# EAGLE board SIHMTEST (EAGLE 8.0.0)
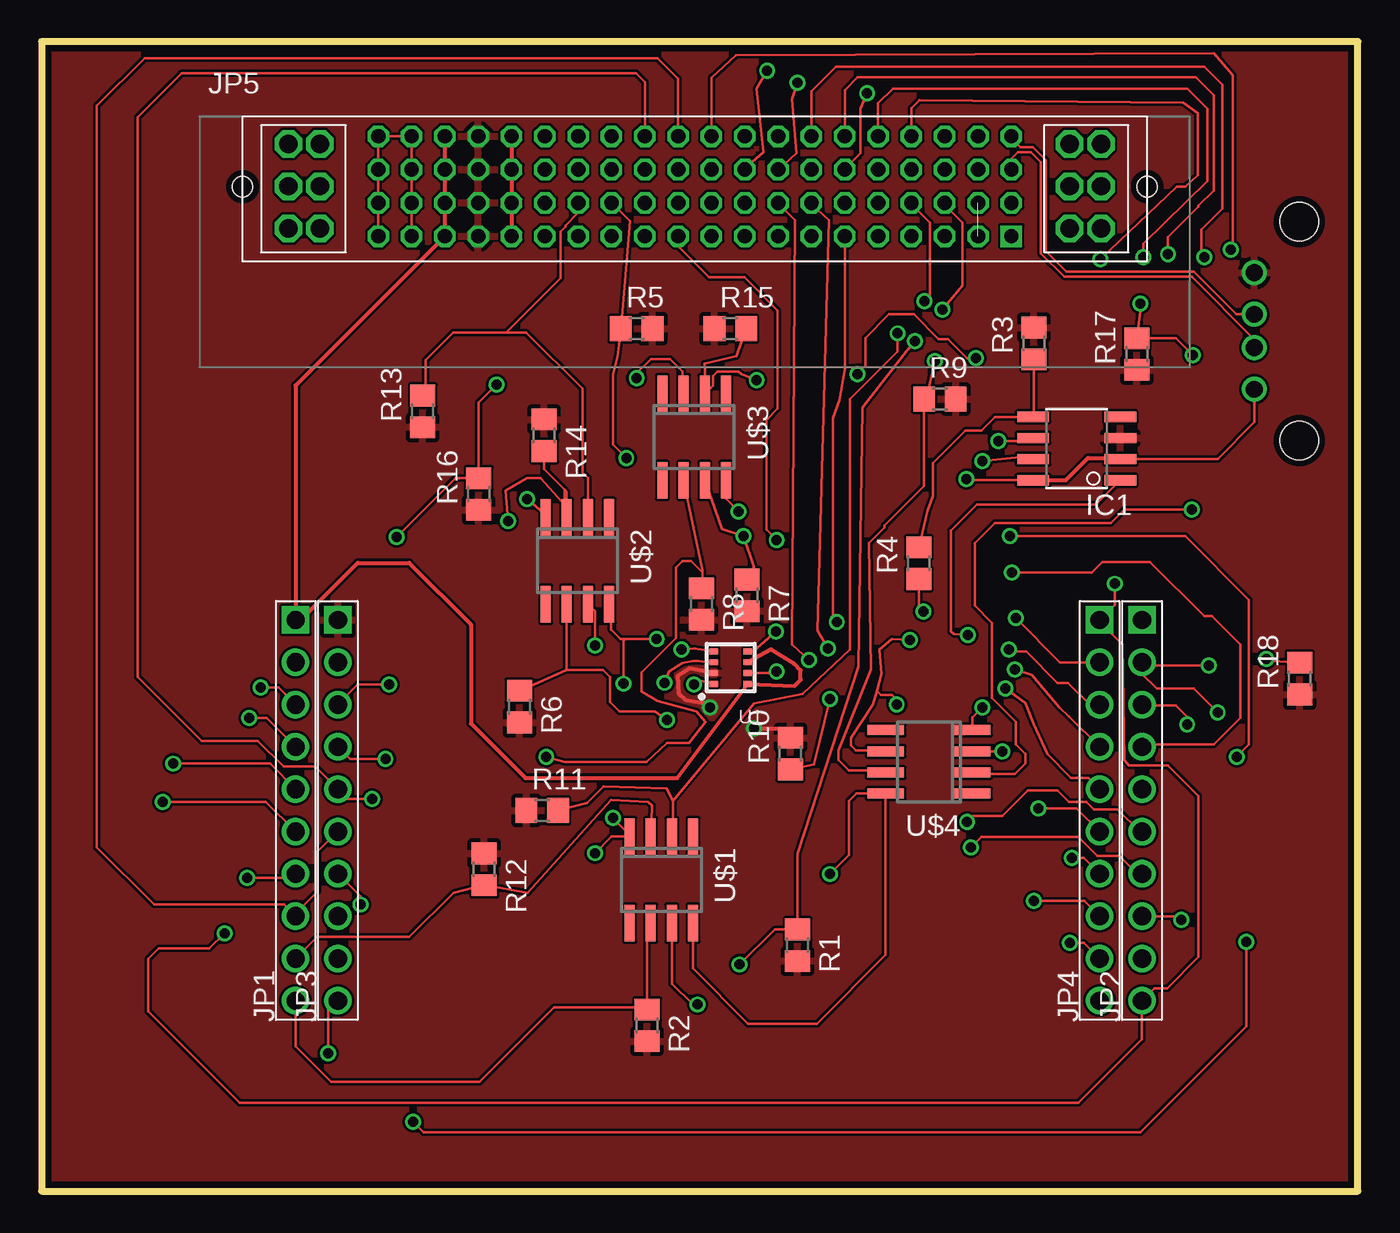
[diagram p0: board, top side]
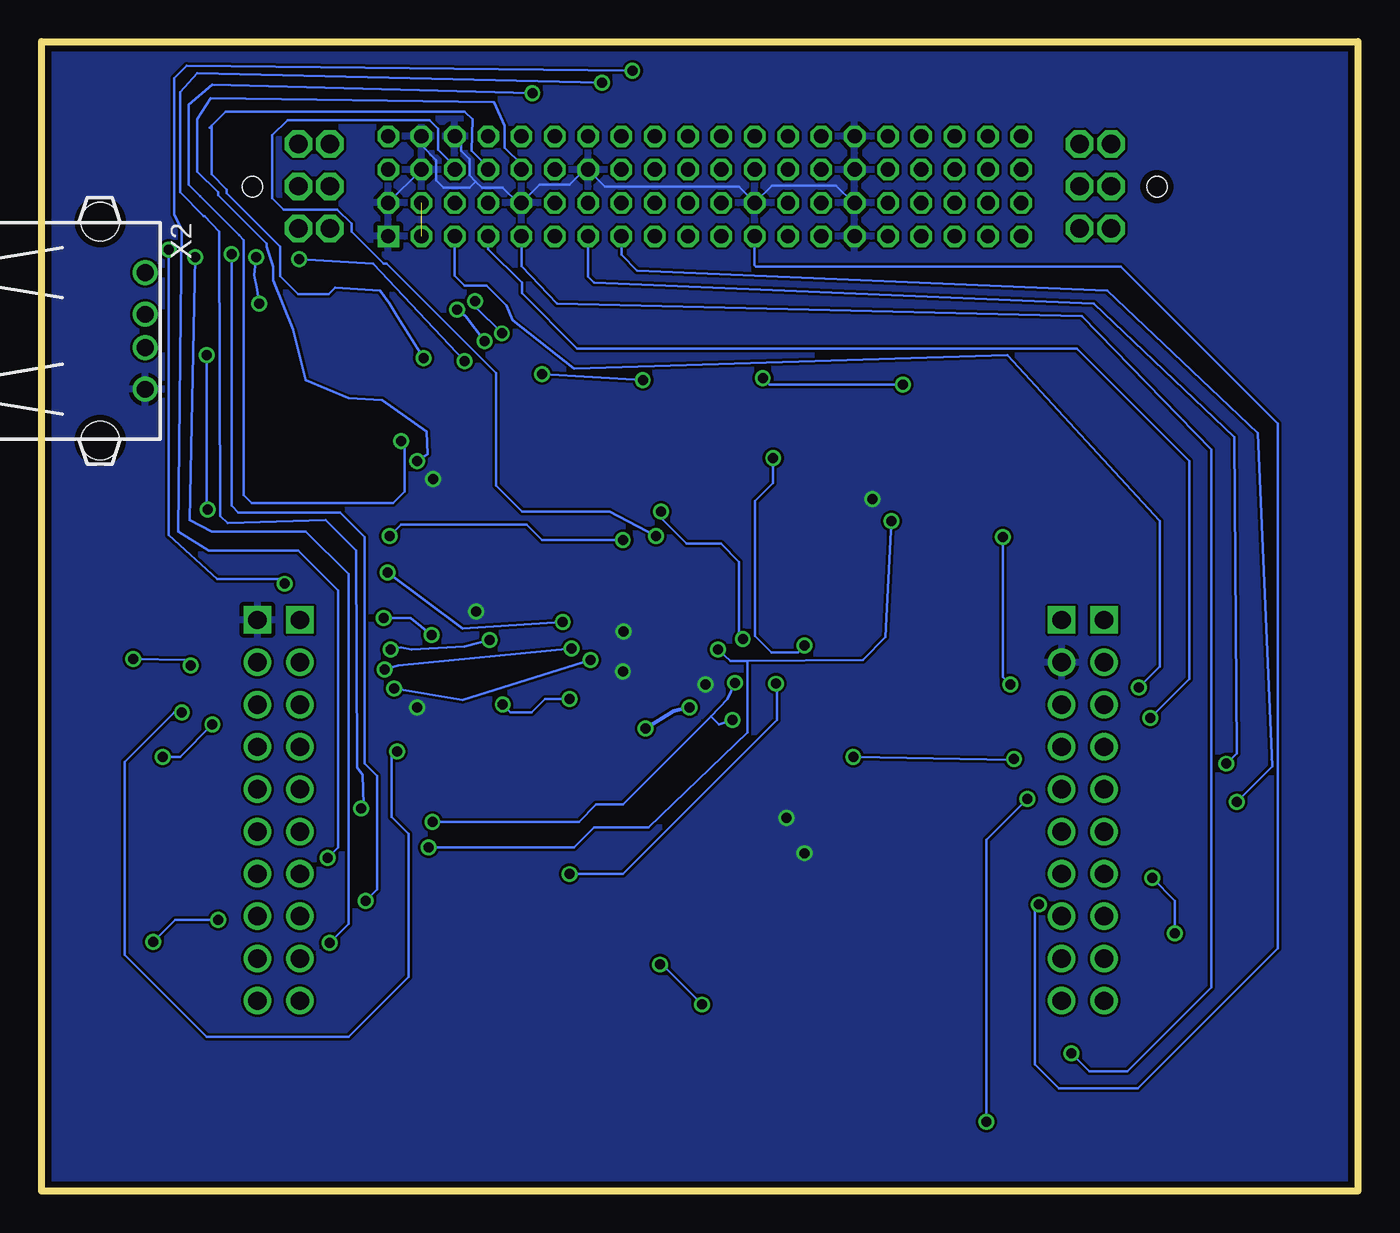
[diagram p1: board, bottom side, seen from below]

Size 79 x 69 mm. Coordinates in mm from the lower left corner, seen from the top.
Outline: 0,0 79,0 79,69 0,69 0,0
Copper layers (1*16): Top 0.0356mm / dielectric 1.5011mm / Bottom 0.0356mm
Design rules "OshPark": minimum track width 6mil, minimum drill 13mil, track to track 6mil, track to pad 6mil, pad to pad 6mil, via to via 6mil, smd to smd 6mil, copper to edge 15mil, drill to drill 6mil, minimum pad ring 7mil, minimum via ring 7mil, stop-mask expansion 3mil, vias tented up to drill 0mil, thermal gap 10mil
Net classes: 1 usb: clearance 0.152 mm

## Footprints (pad centres in the part's own frame; a part is rotated, then mirrored left to right if it is on the bottom)
SO08 = smd 0.61 x 1.905: 1 -1.905,-2.616; 2 -0.635,-2.616; 3 0.635,-2.616; 4 1.905,-2.616; 5 1.905,2.616; 6 0.635,2.616; 7 -0.635,2.616; 8 -1.905,2.616
KK254_10-PIN = drill 1.1 square: P$1 11.43,0 | drill 1.1: P$2 8.89,0; P$3 6.35,0; P$4 3.81,0; P$5 1.27,0; P$6 -1.27,0; P$7 -3.81,0; P$8 -6.35,0; P$9 -8.89,0; P$10 -11.43,0
MPSC-01-80 = drill 0.86 square: 1 19,0.33 | drill 0.86 octagon: 2 17,0.33; 3 15,0.33; 4 13,0.33; 5 11,0.33; 6 9,0.33; 7 7,0.33; 8 5,0.33; 9 3,0.33; 10 1,0.33; 11 -1,0.33; 12 -3,0.33; 13 -5,0.33; 14 -7,0.33; 15 -9,0.33; 16 -11,0.33; 17 -13,0.33; 18 -15,0.33; 19 -17,0.33; 20 -19,0.33; 21 19,2.33; 22 17,2.33; 23 15,2.33; 24 13,2.33; 25 11,2.33; 26 9,2.33; 27 7,2.33; 28 5,2.33; 29 3,2.33; 30 1,2.33; 31 -1,2.33; 32 -3,2.33; 33 -5,2.33; 34 -7,2.33; 35 -9,2.33; 36 -11,2.33; 37 -13,2.33; 38 -15,2.33; 39 -17,2.33; 40 -19,2.33; 41 19,4.33; 42 17,4.33; 43 15,4.33; 44 13,4.33; 45 11,4.33; 46 9,4.33; 47 7,4.33; 48 5,4.33; 49 3,4.33; 50 1,4.33; 51 -1,4.33; 52 -3,4.33; 53 -5,4.33; 54 -7,4.33; 55 -9,4.33; 56 -11,4.33; 57 -13,4.33; 58 -15,4.33; 59 -17,4.33; 60 -19,4.33; 61 19,6.33; 62 17,6.33; 63 15,6.33; 64 13,6.33; 65 11,6.33; 66 9,6.33; 67 7,6.33; 68 5,6.33; 69 3,6.33; 70 1,6.33; 71 -1,6.33; 72 -3,6.33; 73 -5,6.33; 74 -7,6.33; 75 -9,6.33; 76 -11,6.33; 77 -13,6.33; 78 -15,6.33; 79 -17,6.33; 80 -19,6.33 | drill 1.1 octagon: P1,1 -24.385,0.79; P1,2 -22.505,0.79; P1,3 -24.385,3.33; P1,4 -22.505,3.33; P1,5 -24.385,5.87; P1,6 -22.505,5.87; P2,1 24.385,0.789; P2,2 22.505,0.789; P2,3 24.385,3.329; P2,4 22.505,3.329; P2,5 24.385,5.869; P2,6 22.505,5.869 | hole 1.2: -27.145,3.3; 27.145,3.3
R0805 = smd 1.3 x 1.5: 1 -0.95,0; 2 0.95,0
BME280_LGA = smd 0.5 x 0.35: P$1 1.025,0.975; P$2 1.025,0.325; P$3 1.025,-0.325; P$4 1.025,-0.975; P$5 -1.025,-0.975; P$6 -1.025,-0.325; P$7 -1.025,0.325; P$8 -1.025,0.975
SO8 = smd 0.6 x 2.2: 1 -1.905,-2.6; 2 -0.635,-2.6; 3 0.635,-2.6; 4 1.905,-2.6; 5 1.905,2.6; 6 0.635,2.6; 7 -0.635,2.6; 8 -1.905,2.6
USB = drill 1: 1 -3.5,12.99; 2 -1,12.99; 3 1,12.99; 4 3.5,12.99 | hole 2.3: -6.57,10.28; 6.57,10.28

## Placement (x,y rotation side)
IC1  MCP2551/SN  [SO08]  62.12,44.58 90 top
JP1  KK254_10-PIN  [KK254_10-PIN]  15.24,22.86 90 top
JP2  KK254_10-PIN  [KK254_10-PIN]  66.04,22.86 90 top
JP3  KK254_10-PIN  [KK254_10-PIN]  17.78,22.86 90 top
JP4  KK254_10-PIN  [KK254_10-PIN]  63.5,22.86 90 top
JP5  [MPSC-01-80]  39.2,56.99 0 top
R1  5k  [R0805]  45.37,14.76 270 top
R2  5k  [R0805]  36.34,9.96 270 top
R3  10k  [R0805]  59.56,50.89 90 top
R4  10k  [R0805]  52.64,37.69 90 top
R5  5k  [R0805]  35.71,51.77 0 top
R6  5k  [R0805]  28.68,29.09 270 top
R7  5k  [R0805]  42.34,35.77 270 top
R8  5k  [R0805]  39.6,35.25 270 top
R9  5k  [R0805]  53.91,47.55 0 top
R10  5k  [R0805]  44.93,26.27 90 top
R11  5k  [R0805]  30.05,22.85 0 top
R12  5k  [R0805]  26.56,19.32 270 top
R13  5k  [R0805]  22.87,46.81 90 top
R14  5k  [R0805]  30.16,45.37 270 top
R15  5k  [R0805]  41.33,51.77 0 top
R16  5k  [R0805]  26.24,41.84 90 top
R17  5k  [R0805]  65.73,50.25 90 top
R18  5k  [R0805]  75.5,30.77 90 top
U1  BME280  [BME280_LGA]  41.36,31.43 180 top
U$1  P82B715  [SO8]  37.19,18.69 180 top
U$2  P82B715  [SO8]  32.15,37.83 180 top
U$3  P82B715  [SO8]  39.17,45.26 180 top
U$4  P82B715  [SO8]  53.26,25.77 90 top
X2  [USB]  85.78,51.63 270 bottom

## Library data of the parts
IC1 = microchip-dspic
JP1-JP4 = molex
JP5 = samtec
R1-R18 = resistor
U1 = BME280ComponentLibrary; PROD_ID: IC-13090
U$1-U$4 = NXP
X2 = con-amp

## Nets
3.3V: JP1.P$1 JP5.18 JP5.38 JP5.58 JP5.78 U1.P$6 U1.P$8
5V: IC1.3 JP3.P$1 JP5.17 JP5.37 JP5.57 JP5.77 R1.2 R2.2 R3.2 R5.2 R6.2 R7.2 R8.2 R9.2 R10.2 R11.1 R12.1 R13.1 R14.1 R15.1 R16.1 R17.1 R18.1 U1.P$2 X2.1
12V: JP5.16 JP5.36 JP5.56 JP5.76
ACT_SCL: JP5.24 R11.2 U$1.2
ACT_SDA: JP5.23 R1.1 U$1.7
ACT_UNBUFFERSCL: JP1.P$9 R12.2 U$1.3
ACT_UNBUFFERSDA: JP1.P$10 R2.1 U$1.6
AGND: JP5.19 JP5.20 JP5.39 JP5.40 JP5.59 JP5.60 JP5.79 JP5.80
BATT_SCL: JP5.44 R15.2 U$3.2
BATT_SDA: JP5.43 R7.1 U$3.7
BATT_UNBUFFERSCL: JP3.P$3 R16.2 U$3.3
BATT_UNBUFFERSDA: JP3.P$4 R8.1 U$3.6
BUFFERVCC: U$1.8 U$2.8 U$3.8 U$4.8
CANH: IC1.7 JP5.45
CANL: IC1.6 JP5.46
CANRX: IC1.4
CANTX: IC1.1 JP4.P$2
CE_2: JP5.52
CE_3: JP5.53
CE_4: JP5.54
CE_CPU: JP5.74
CE_LEDS: JP5.73
CTS_CF: JP5.13
CTS_MC: JP5.29
CTS_MD: JP5.68
CTS_MF: JP3.P$10 JP5.5
CTS_PF: JP5.9
CTS_SF: JP5.50
DGND: IC1.2 IC1.8 JP2.P$1 JP3.P$2 JP5.1 JP5.15 JP5.21 JP5.25 JP5.32 JP5.35 JP5.42 JP5.47 JP5.55 JP5.62 JP5.63 JP5.75 R4.1 U1.P$1 U1.P$5 U1.P$7 U$1.4 U$2.4 U$4.4 X2.4
EXT_SCL: JP5.34 R13.2 U$2.2
EXT_SDA: JP5.33 R5.1 U$2.7
EXT_UNBUFFERSCL: JP2.P$7 R14.2 U1.P$4 U$2.3
EXT_UNBUFFERSDA: JP2.P$6 R6.1 U1.P$3 U$2.6
GPIO: JP5.2 JP5.22
INT_SCL: JP5.65 R17.2 U$4.2
INT_SDA: JP5.64 R9.1 U$4.7
INT_UNBUFFERSCL: JP2.P$2 R18.2 U$4.3
INT_UNBUFFERSDA: JP4.P$3 R10.1 U$4.6
MISO: JP2.P$8 JP3.P$5 JP5.72
MOSI: JP1.P$8 JP3.P$6 JP5.71
N$2: IC1.5 R3.1 R4.2
PA3: JP2.P$9
PB5: JP1.P$2
PE2: JP3.P$8
PE3: JP3.P$9
PF4: JP4.P$10
PWM_0: JP5.31
PWM_1: JP5.26
RES: JP2.P$5
RTS_CF: JP5.14
RTS_MC: JP5.30
RTS_MD: JP5.69
RTS_MF: JP2.P$4 JP5.6
RTS_PF: JP5.10
RTS_SF: JP5.51
RX_CF: JP2.P$3 JP5.11
RX_MC: JP4.P$4 JP5.27
RX_MD: JP4.P$8 JP5.66
RX_MF: JP1.P$3 JP5.3
RX_PF: JP1.P$5 JP5.7
RX_SF: JP4.P$6 JP5.48
SPI_CLK: JP1.P$7 JP2.P$10 JP4.P$1 JP5.70
TX_CF: JP3.P$7 JP5.12
TX_MC: JP4.P$5 JP5.28
TX_MD: JP4.P$9 JP5.67
TX_MF: JP1.P$4 JP5.4
TX_PF: JP1.P$6 JP5.8
TX_SF: JP4.P$7 JP5.49
USB_N [usb]: JP5.61 X2.2
USB_P [usb]: JP5.41 X2.3

## Tracks (layer width: path | path; a pad name or v marks a point on that pad's centre or on a via)
3.3V
  Top 0.254: JP5.78 JP5.58 JP5.38 JP5.18 15.24,48.36 JP1.P$1 15.54,34.29 18.97,37.72 22.06,37.72 25.77,34 25.77,28.06 29.03,24.8 38.16,24.8 U1.P$8 45.2,30.34 45.55,30.69 45.55,31.26 45.15,31.66 43.78,32.52 U1.P$6
5V  (via drill 0.6)
  Top 0.254: U1.P$2 38.87,31.39 38.18,30.92 38.23,29.89 38.63,29.49 39.72,29.32 v40.12,29.03 | v42.75,27.77 44.38,27.77 R10.2
  Bottom 0.254: v40.12,29.03 41.09,28.8 v42.75,27.77
  pour Top: 0,68.94 79,69 79,0 0,0
12V
  Top 0.254: JP5.76 JP5.56 JP5.36 JP5.16
ACT_SCL  (via drill 0.6)
  Top 0.152: JP5.24 52.2,59.24 53.32,58.12 53.32,53.78 v52.98,53.44 | v51.38,51.49 51.38,50.41 48.52,47.55 48.52,32.52 45.66,29.83 42.75,29.26 37.89,23.43 | 37.89,23.43 37.89,21.35 U$1.2 | R11.2 32.73,23.3 33.72,24.29 37.49,24.17 37.89,23.43
  Bottom 0.152: v52.98,53.44 52.98,53.09 v51.38,51.49
ACT_SDA  (via drill 0.6)
  Top 0.152: JP5.23 54.2,59.18 55.26,58.12 55.26,54.35 v54.06,52.92 | v52.41,51.03 51.95,50.46 49.26,47.03 49.03,31.49 45.38,20.23 45.38,18.39 R1.1 44,15.71 v41.89,13.6 | v39.38,11.2 39.09,11.2 37.83,12.46 U$1.7
  Bottom 0.152: v54.06,52.92 53.55,52.52 v52.41,51.03 | v41.89,13.6 41.78,13.6 v39.38,11.2
ACT_UNBUFFERSCL
  Top 0.152: U$1.3 36.58,21.31 36.63,23.15 36.41,23.37 34.18,23.49 29.18,17.92 R12.2 24.72,17.92 22.06,15.26 16.53,15.26 JP1.P$9
ACT_UNBUFFERSDA
  Top 0.152: U$1.6 36.34,15.87 R2.1 36.22,11.03 30.75,11.03 26.29,6.57 17.37,6.57 15.24,8.71 JP1.P$10
AGND
  Top 0.152: JP5.19 JP5.39 JP5.59 JP5.79 JP5.80 JP5.60 JP5.40 JP5.20
BATT_SCL  (via drill 0.6)
  Top 0.152: R15.2 41.71,50.11 39.78,49.66 39.83,48.52 40.15,48.21 | v56.06,50.01 55.55,50.01 54.41,51.15 53.84,51.15 52.35,52.63 50.86,52.63 49.44,51.21 49.44,49.55 v48.98,49.03 | v42.92,48.69 42.01,49.03 41.83,49.21 40.58,49.21 40.29,48.92 40.29,48.35 40.15,48.21 | 40.15,48.21 U$3.2
  Bottom 0.152: JP5.44 52.2,61.46 53.21,62.47 53.15,64.35 53.61,64.81 67.95,64.81 68.81,63.95 | 68.81,63.95 68.92,63.84 | 68.81,63.95 68.81,61.04 67.89,60.12 67.89,59.89 64.69,56.69 64.69,54.92 63.61,53.84 61.78,53.84 61.38,54.23 58.69,54.06 58.12,53.26 57.66,52.52 v56.06,50.01 | v48.98,49.03 v42.92,48.69
BATT_SDA  (via drill 0.6)
  Top 0.152: R7.1 42.75,37.47 v42.12,39.32 40.83,39.75 U$3.7
  Bottom 0.152: JP5.43 54.2,61.52 55.21,62.52 55.21,63.78 55.72,64.29 64.24,64.29 65.15,63.38 65.15,59.61 64.47,58.92 61.27,58.92 60.41,58.06 60.41,57.61 58.46,55.66 58.29,55.66 51.72,49.09 51.72,42.35 50.18,40.8 44.92,40.8 v42.12,39.32
BATT_UNBUFFERSCL  (via drill 0.6)
  Top 0.152: v27.32,48.41 26.24,47.33 R16.2 24.84,42.79 v21.32,39.26 | v35.72,48.81 35.72,49.09 36.58,49.95 37.72,49.95 38.46,49.21 38.46,47.93 U$3.3 | v20.86,30.4 18.97,30.4 JP3.P$3
  Bottom 0.152: v27.32,48.41 35.32,48.41 v35.72,48.81 | v21.32,39.26 21.32,30.86 v20.86,30.4
BATT_UNBUFFERSDA  (via drill 0.6)
  Top 0.152: U$3.6 39.67,37.27 39.66,37.09 | 39.66,37.09 R8.1 | 39.66,37.09 39.66,37.15 38.98,37.83 38.46,37.83 38.06,37.43 38.06,33.2 36.01,31.15 36.01,30 36.98,29.43 39.32,28.8 39.83,28.18 38.86,26.92 37.55,26.92 36.29,25.77 31.38,25.77 v30.29,26.06 | v20.63,25.95 18.5,25.95 JP3.P$4
  Bottom 0.152: v30.29,26.06 20.69,25.89 v20.63,25.95
BUFFERVCC  (via drill 0.6)
  Top 0.152: U$3.8 41.07,41.57 v41.83,40.8 | 35.03,33.15 v36.92,33.15 | 35.03,33.15 34.75,33.15 34.18,33.72 34.18,35.11 U$2.8 | U$1.8 39.09,13.37 42.41,10.06 46.52,10.06 50.66,14.2 U$4.8 48.9,23.86 48.46,23.43 48.46,20.17 v47.32,19.03 | v34.92,30.46 34.92,33.03 35.03,33.15
  Bottom 0.152: v41.83,40.8 41.83,40.41 40.29,38.86 38.23,38.86 37.15,37.78 37.15,33.38 v36.92,33.15 | v47.32,19.03 44.12,19.03 34.86,28.29 34.86,30.4 v34.92,30.46
CANH  (via drill 0.6)
  Top 0.152: v56.46,43.83 59.33,44.12 IC1.7
  Bottom 0.152: JP5.45 50.2,61.63 51.21,62.64 51.21,63.95 51.84,65.38 68.87,65.61 69.67,64.35 69.67,61.21 68.41,59.95 68.41,59.78 65.49,56.86 65.49,56.69 65.09,55.49 65.09,54.69 63.89,51.72 63.15,48.69 60.58,47.61 58.58,47.49 55.89,45.61 55.84,44.23 v56.46,43.83
CANL  (via drill 0.6)
  Top 0.152: JP5.46 48.2,61.35 49.15,62.29 49.15,64.98 v49.55,65.89 | v57.44,45.03 59.33,45.03 IC1.6
  Bottom 0.152: v49.55,65.89 68.75,66.41 70.18,65.21 70.18,60.41 69.49,59.72 67.15,57.38 66.86,57.09 66.86,41.78 66.41,41.32 57.89,41.32 57.21,42.01 57.21,44.81 v57.44,45.03
CANTX  (via drill 0.6)
  Top 0.152: JP4.P$2 61.12,31.75 v58.46,34.4 | v55.61,33.38 54.75,33.43 54.58,33.6 54.58,39.66 56.12,41.2 63.27,41.2 IC1.1
  Bottom 0.152: v58.46,34.4 56.86,34.4 v55.61,33.38
CTS_MF  (via drill 0.6)
  Top 0.152: v17.2,8.29 17.2,10.85 JP3.P$10
  Bottom 0.152: JP5.5 50.2,55.52 48.06,53.26 16.57,52.52 8.8,44.52 8.8,12.23 13.83,7.2 16.12,7.2 v17.2,8.29
DGND  (via drill 0.6)
  Top 0.152: U$2.4 30.25,40.62 v29.15,41.55 | v33.2,20.29 34.2,21.29 U$1.4 35.29,21.35 v34.29,22.4 | U1.P$1 39.59,30.62 v39.15,30.4 | IC1.8 55.57,42.67 v55.49,42.75 | R4.1 52.64,35.08 v52.92,34.8 | U$4.4 55.86,28.43 v56.46,29.03 | U1.P$7 44.02,31.1 v44.12,31.2 | U1.P$5 42.69,32.4 v44.06,33.6 | X2.4 72.79,46.15 70.58,43.95 IC1.2
  Top 0.254: IC1.8 61.47,42.67 62.81,44.01 64.67,44.01 IC1.2
  Bottom 0.152: JP5.35 30.29,59.32 31.32,60.35 35.18,60.35 JP5.32 36.2,59.35 37.15,60.29 45.18,60.29 JP5.47 46.41,61.32 47.32,60.41 49.12,60.41 JP5.25 50.41,59.32 51.32,60.24 52.58,60.24 52.95,60.61 | 52.95,60.61 53.32,60.98 53.32,61.95 53.84,62.47 53.84,62.95 JP5.63 | JP5.42 JP5.21 | JP5.62 56.2,62.78 55.32,61.89 55.32,60.69 54.86,60.24 53.32,60.24 52.95,60.61
  pour Bottom: 0,69 79,69 79,0 0,0
EXT_SCL
  Top 0.152: JP5.34 32.2,58.72 31.43,57.95 31.43,57.89 31.15,57.61 31.15,54.81 27.89,51.55 | 27.89,51.55 24.69,51.55 23.03,49.89 23.03,47.91 R13.2 | 27.89,51.55 29.09,51.55 32.46,48.18 32.46,43.15 32.8,42.8 32.8,40.45 U$2.2
EXT_SDA  (via drill 0.6)
  Top 0.152: JP5.33 35.3,58.22 R5.1 34.56,50.1 34.29,49.03 34.29,44.81 v35.09,44.01 | v33.2,32.75 33.2,34.81 U$2.7
  Bottom 0.152: v35.09,44.01 35.09,42.52 36.18,41.43 36.18,33.32 35.2,32.35 33.6,32.35 v33.2,32.75
EXT_UNBUFFERSCL  (via drill 0.6)
  Top 0.152: R14.2 30.16,43.33 31.38,42.12 | 31.38,42.12 31.38,40.57 U$2.3 | U$2.3 31.52,41.98 31.38,42.12 | U$2.3 31.52,41.06 29.95,42.8 29.15,42.8 27.83,42.06 27.95,40.98 v28,40.23 | v38.41,32.52 39.19,32.58 U1.P$4 | JP2.P$7 65.76,19.05 64.69,20.12 63.38,20.12 62.24,21.26 56.41,21.26 v55.78,20.63
  Bottom 0.152: v28,40.23 28.35,33.26 29.72,31.89 36.64,31.84 | 36.64,31.84 37.66,31.83 v38.41,32.52 | v55.78,20.63 47.03,20.63 45.83,21.83 42.58,21.83 36.63,27.55 36.63,31.61 36.64,31.84
EXT_UNBUFFERSDA  (via drill 0.6)
  Top 0.152: JP2.P$6 65.91,21.59 64.58,22.92 63.15,22.92 62.69,23.37 61.66,23.37 60.98,24.06 59.21,24.06 57.66,22.52 55.89,22.52 v55.55,22.17 | v37.38,30.52 37.66,31.2 38.46,31.72 39.09,31.83 39.43,31.83 40.3,31.72 U1.P$3 | U$2.6 31.52,31.27 | 31.52,31.27 R6.1 | 31.52,31.27 33.71,31.27 34.12,30.86 34.12,29.38 34.69,28.8 36.8,28.8 v37.55,28.29
  Bottom 0.152: v55.55,22.17 46.75,22.17 45.72,23.2 44.12,23.2 38.83,28.49 | 38.83,28.49 37.83,29.55 v37.38,30.52 | v37.55,28.29 38.35,28 38.83,28.49
GPIO  (1 unrouted)
INT_SCL  (via drill 0.6)
  Top 0.152: JP5.65 50.2,65.29 51.09,66.18 68.75,66.18 69.95,64.98 69.95,60.64 66.12,56.86 v66.12,56.06 | v65.95,53.26 66.01,53.26 R17.2 68.08,51.2 v69.09,50.18 | v69.04,40.92 64.98,40.92 64.18,40.12 57.21,40.12 56.01,38.92 56.01,35.15 57.04,34.12 57.04,29.6 58.46,28.18 58.46,26.8 59.04,26.23 59.04,25.66 58.41,25.03 55.96,25.03 U$4.2
  Bottom 0.152: v66.12,56.06 66.24,54.98 66.06,54.12 v65.95,53.26 | v69.09,50.18 69.09,40.98 v69.04,40.92
INT_SDA  (via drill 0.6)
  Top 0.152: JP5.64 52.2,65.01 52.69,65.49 68.52,65.32 69.38,64.69 69.38,60.98 68.64,60.29 68.12,60.29 v63.55,55.95 | v53.61,49.84 53.15,47.74 R9.1 52.96,42.33 50.58,39.95 50.58,39.83 49.66,38.92 49.78,31.32 47.84,26.46 47.84,25.89 48.46,25.26 50.53,25.26 U$4.7
  Bottom 0.152: v63.55,55.95 59.09,55.66 v53.61,49.84
INT_UNBUFFERSCL  (via drill 0.6)
  Top 0.152: R18.2 73.15,31.89 v73.5,31.95 | v70.07,31.55 66.24,31.55 JP2.P$2 66.04,31.06 66.92,30.18 69.15,30.18 v70.58,28.75 | v57.66,26.4 U$4.3
  Bottom 0.152: v73.5,31.95 70.41,31.89 v70.07,31.55 | v70.58,28.75 71.04,28.75 74.01,25.77 74.01,14.17 69.09,9.26 60.58,9.26 56.98,12.86 56.98,21.43 58.01,22.46 58.01,26.06 v57.66,26.4
INT_UNBUFFERSDA  (via drill 0.6)
  Top 0.152: JP4.P$3 62.92,29.21 61.61,30.52 60.98,30.52 59.09,32.4 58.18,32.4 v58.06,32.52 | v52.12,33.09 51.03,33.15 50.29,32.52 50.41,31.03 50.12,30.03 | 50.12,30.03 49.89,29.2 48.58,27.2 48.58,26.75 48.86,26.46 50.6,26.46 U$4.6 | R10.1 46.35,25.6 v47.32,29.55 | v51.32,29.2 51.32,29.49 51.03,29.77 50.38,29.77 50.12,30.03
  Bottom 0.152: v58.06,32.52 57.44,32.63 56.81,32.52 53.61,32.69 v52.12,33.09 | v47.32,29.55 48.79,29.55 49.59,28.74 50.86,28.74 v51.32,29.2
MISO  (via drill 0.6)
  Top 0.152: JP5.72 36.2,66.55 35.66,67.09 8.4,67.09 5.77,64.47 5.77,30.86 9.6,27.03 12.97,27.03 14.52,25.49 16.42,25.49 JP3.P$5 18.36,23.55 v19.83,23.55 | JP2.P$8 68.19,16.51 v68.41,16.29 | v72.3,14.97 72.3,9.89 65.95,3.54 22.92,3.54 v22.29,4.17
  Bottom 0.152: v68.41,16.29 70.98,16.29 v72.3,14.97 | v22.29,4.17 22.29,21.09 v19.83,23.55
MOSI
  Top 0.152: JP5.71 38.2,66.78 36.98,68.01 6.17,68.01 3.31,65.15 3.31,20.63 6.74,17.2 14.55,17.2 JP1.P$8 15.24,16.67 16.57,18 16.57,20.38 JP3.P$6
N$2
  Top 0.152: R4.2 53.16,40.81 53.49,41.72 53.49,43.72 55.44,45.66 56.41,45.66 57.21,46.46 59.49,46.46 IC1.5 59.56,46.53 R3.1
RTS_MF  (via drill 0.6)
  Top 0.152: JP5.6 48.2,49.35 48.18,49.21 47.89,47.49 47.49,46.41 47.49,34.4 v47.72,34.18 | v58.24,37.15 63.04,37.15 63.66,37.78 66.52,37.78 69.78,34.52 70.24,34.52 71.95,32.8 71.95,28.4 70.35,26.8 66.17,26.8 JP2.P$4
  Bottom 0.152: v47.72,34.18 53.72,33.78 v58.24,37.15
RX_CF  (via drill 0.6)
  Top 0.152: JP5.11 38.2,56.72 40.06,54.86 42.18,54.86 44.18,52.86 44.18,46.98 43.49,46.29 43.49,39.72 v44.12,39.09 | v58.12,39.32 68.64,39.32 72.47,35.49 72.47,26.8 v71.72,26.06 | v68.75,28 68.75,28.46 68.07,29.15 66.1,29.15 JP2.P$3
  Bottom 0.152: v44.12,39.09 48.98,39.09 49.89,40.01 57.44,40.01 v58.12,39.32 | v71.72,26.06 70.69,26.06 v68.75,28
RX_MC  (via drill 0.6)
  Top 0.152: JP5.27 46.2,59.24 47.26,58.29 46.58,33.66 v47.21,32.58 | v58.41,31.32 59.44,30.98 61.09,29.03 61.66,28.5 JP4.P$4
  Bottom 0.152: v47.21,32.58 57.61,31.55 v58.41,31.32
RX_MD  (via drill 0.6)
  Top 0.152: JP5.66 48.2,66.09 48.98,66.86 69.27,66.86 70.35,65.78 70.35,60.06 69.44,59.15 69.44,59.09 67.61,57.26 v67.61,56.24 | v59.55,17.43 62.58,17.43 JP4.P$8
  Bottom 0.152: v67.61,56.24 67.61,41.15 67.21,40.75 61.09,40.75 59.61,39.26 59.61,25.66 58.86,24.92 58.86,18.12 v59.55,17.43
RX_MF  (via drill 0.6)
  Top 0.152: v13.14,30.23 14.22,30.23 JP1.P$3
  Bottom 0.152: JP5.3 54.2,54.95 53.61,54.35 52.29,54.35 51.09,53.15 50.75,52.29 47.03,49.38 21.03,50.18 11.89,40.23 11.89,31.49 v13.14,30.23
RX_PF  (via drill 0.6)
  Top 0.152: v7.89,25.66 13.71,25.66 JP1.P$5
  Bottom 0.152: JP5.7 46.2,54.89 45.83,54.52 15.83,53.26 7.43,45.26 7.26,26.29 v7.89,25.66
RX_SF  (via drill 0.6)
  Top 0.152: JP5.48 44.23,61.32 45.32,62.29 45.03,65.55 v45.38,66.52 | v59.84,22.97 62.12,22.97 JP4.P$6
  Bottom 0.152: v45.38,66.52 69.67,67.09 70.69,65.95 70.69,59.95 69.27,58.52 69.21,58.52 68.35,57.61 68.29,40.52 67.84,40.12 61.95,40.29 60.12,38.46 60.06,25.43 59.72,24.98 59.66,23.2 v59.84,22.97
SPI_CLK  (via drill 0.6)
  Top 0.152: JP5.70 40.2,66.84 41.66,68.18 70.35,68.29 71.5,66.98 71.5,56.92 v71.38,56.52 | v64.41,36.46 64.41,35.2 JP4.P$1 63.5,34.17 64.86,32.8 64.98,25.89 65.27,25.55 67.61,25.55 69.44,23.72 69.44,14.06 67.55,12.17 66.78,12.17 JP2.P$10 66.04,9.12 62.24,5.32 11.89,5.32 6.4,10.8 6.4,13.95 7.03,14.57 10.06,14.57 v10.97,15.49 | v12.34,18.8 14.99,18.8 JP1.P$7
  Bottom 0.152: v71.38,56.52 71.38,39.38 68.47,36.75 64.69,36.75 v64.41,36.46 | v10.97,15.49 10.97,17.43 v12.34,18.8
TX_CF  (via drill 0.6)
  Top 0.152: v19.14,17.2 19.14,17.68 JP3.P$7
  Bottom 0.152: JP5.12 36.2,55.58 36.12,55.49 14.23,55.49 4.8,46.06 4.8,14.57 13.2,6.17 17.95,6.17 19.37,7.6 19.37,16.97 v19.14,17.2
TX_MC  (via drill 0.6)
  Top 0.152: JP5.28 44.2,59.29 45.21,58.29 45.03,32.8 v46.06,31.89 | v57.84,30.18 59.04,29.32 59.55,28 60.35,26.23 61.78,24.8 62.83,24.8 JP4.P$5
  Bottom 0.152: v46.06,31.89 53.72,29.49 v57.84,30.18
TX_MD  (via drill 0.6)
  Top 0.152: JP5.67 46.2,66.04 47.66,67.49 69.78,67.49 70.87,66.41 70.87,58.98 69.61,57.72 69.61,56.46 v69.78,56.06 | v61.72,14.92 62.55,14.92 JP4.P$9
  Bottom 0.152: v69.78,56.06 70.12,40.29 68.81,39.6 63.15,39.6 60.58,37.03 60.58,16.06 v61.72,14.92
TX_MF  (via drill 0.6)
  Top 0.152: v12.46,28.4 13.51,28.4 JP1.P$4
  Bottom 0.152: JP5.4 52.2,56.55 50.18,54.52 50.18,53.89 46.86,50.58 16.86,50.58 10.12,43.83 10.12,30.75 v12.46,28.4
TX_PF  (via drill 0.6)
  Top 0.152: v7.26,23.37 13.46,23.37 JP1.P$6
  Bottom 0.152: JP5.8 44.2,56.21 43.26,55.26 15.03,54.06 6,45.49 5.14,25.49 v7.26,23.37
TX_SF  (via drill 0.6)
  Top 0.152: JP5.49 42.2,61.41 43.32,62.35 42.92,66.18 v43.55,67.27 | v61.84,20 62.55,20 JP4.P$7
  Bottom 0.152: v43.55,67.27 70.29,67.55 71.04,66.81 71.04,58.64 70.58,57.72 70.81,39.6 68.98,38.46 63.61,38.46 61.21,36.06 61.21,20.63 v61.84,20
USB_N
  Top 0.152: X2.2 71.71,52.63 69.16,55.19 61.5,55.19 60.27,56.41 60.27,61.9 59.5,62.67 58.75,62.67 58.2,63.22 JP5.61
USB_P
  Top 0.152: X2.3 72.79,51.13 69.03,54.88 61.37,54.88 59.97,56.29 59.97,61.77 59.37,62.37 58.6,62.37 58.12,61.89 58.12,61.41 JP5.41